# EAGLE board Iluminação e tomadas (EAGLE 7.6.0)

Size 73.58 x 63.39 mm. Coordinates in mm from the lower left corner, seen from the top.
Outline: 0,0 56.82,0 56.82,53.33 0,53.33 0,0
Copper layers (1*16): Top 0.035mm / dielectric 1.5mm / Bottom 0.035mm
Design rules "default": minimum track width 10mil, minimum drill 24mil, track to track 8mil, track to pad 8mil, pad to pad 8mil, via to via 8mil, smd to smd 8mil, copper to edge 40mil, drill to drill 8mil, minimum pad ring 10mil, minimum via ring 8mil, stop-mask expansion 4mil, vias tented up to drill 0mil, thermal gap 10mil

## Footprints (pad centres in the part's own frame; a part is rotated, then mirrored left to right if it is on the bottom)
LED5MM = drill 0.813 octagon: A -1.27,0; K 1.27,0
1X3P-2.54-2.54-11.6-3.0-BLACK-MALE = drill 0.889 pad 1.651 square: 1 0,2.54 | drill 0.889 pad 1.651: 2 0,0; 3 0,-2.54
PHOTORESISTOR-2.54 = drill 1 pad 1.5: P$1 -1.27,0; P$2 1.27,0
0207/10 = drill 0.813 octagon: 1 -5.08,0; 2 5.08,0
TL1105 = drill 1 pad 1.676: 1 -2.25,3.25; 2 2.25,3.25; 3 -2.25,-3.25; 4 2.25,-3.25
ARDUINO_UNO = drill 1.016 pad 1.88: 0 63.5,50.8; 1 60.96,50.8; 2 58.42,50.8; 3 55.88,50.8; 3.3V 35.56,2.54; 4 53.34,50.8; 5 50.8,50.8; 5V 38.1,2.54; 6 48.26,50.8; 7 45.72,50.8; 8 41.656,50.8; 9 39.116,50.8; 10 36.576,50.8; 11 34.036,50.8; 12 31.496,50.8; 13 28.956,50.8; A0 50.8,2.54; A1 53.34,2.54; A2 55.88,2.54; A3 58.42,2.54; A4 60.96,2.54; A5 63.5,2.54; AREF 23.876,50.8; GND 26.416,50.8; GND. 43.18,2.54; GND.. 40.64,2.54; I/OREF 30.48,2.54; N/C 27.94,2.54; RESET 33.02,2.54; SCL 18.796,50.8; SDA 21.336,50.8; VIN 45.72,2.54 | hole 3.2: 66.04,7.62; 66.04,35.56; 15.24,50.8; 13.97,2.54

## Placement (x,y rotation side)
D1  [LED5MM]  5,60.88 0 top
D2  [LED5MM]  5,276.78 0 top  (outside the outline)
D3  [LED5MM]  5,302.18 0 top  (outside the outline)
D4  [LED5MM]  5,314.88 0 top  (outside the outline)
D5  [LED5MM]  5,327.58 0 top  (outside the outline)
D6  [LED5MM]  5,340.28 0 top  (outside the outline)
PIRSensor LED 1  [1X3P-2.54-2.54-11.6-3.0-BLACK-MALE]  5,22.78 0 top
PIRSensor LED 2  [1X3P-2.54-2.54-11.6-3.0-BLACK-MALE]  5,73.58 0 top  (outside the outline)
R1  [PHOTORESISTOR-2.54]  5,35.48 0 top
R2  220‎Ω  [0207/10]  5,48.18 0 top
R3  1k‎Ω  [0207/10]  5,391.08 0 top  (outside the outline)
R4  [PHOTORESISTOR-2.54]  5,162.48 0 top  (outside the outline)
R5  10k‎Ω  [0207/10]  5,175.18 0 top  (outside the outline)
R6  10k‎Ω  [0207/10]  5,187.88 0 top  (outside the outline)
R7  10k‎Ω  [0207/10]  5,200.58 0 top  (outside the outline)
R8  10k‎Ω  [0207/10]  5,213.28 0 top  (outside the outline)
R9  10k‎Ω  [0207/10]  5,225.98 0 top  (outside the outline)
R10  10k‎Ω  [0207/10]  5,238.68 0 top  (outside the outline)
R12  1k‎Ω  [0207/10]  5,251.38 0 top  (outside the outline)
R13  220‎Ω  [0207/10]  5,264.08 0 top  (outside the outline)
R14  220‎Ω  [0207/10]  5,289.48 0 top  (outside the outline)
R15  220‎Ω  [0207/10]  5,352.98 0 top  (outside the outline)
R16  220‎Ω  [0207/10]  5,365.68 0 top  (outside the outline)
R19  220‎Ω  [0207/10]  5,378.38 0 top  (outside the outline)
S1  [TL1105]  5,137.08 0 top  (outside the outline)
S2  [TL1105]  5,86.28 0 top  (outside the outline)
S3  [TL1105]  5,98.98 0 top  (outside the outline)
S4  [TL1105]  5,111.68 0 top  (outside the outline)
S5  [TL1105]  5,149.78 0 top  (outside the outline)
SModos Auto/Manual  [TL1105]  5,124.38 0 top  (outside the outline)
U1  [ARDUINO_UNO]  5,10.08 0 top

## Library data of the parts
D1-D6 PIRSensor LED 1 PIRSensor LED 2 R1-R10 R12-R16 R19 S1-S5 SModos Auto/Manual U1 = AUTODESK_CIRCUITS_BREADBOARD

## Nets
N$1: R5.2 SModos Auto/Manual.4 U1.4
N$2: SModos Auto/Manual.3
N$3: PIRSensor LED 1.3 U1.8
N$4: PIRSensor LED 2.3 U1.9
N$5: SModos Auto/Manual.2
N$6: R6.2 S2.4 U1.A4
N$7: S2.2
N$8: S2.3
N$9: S3.2
N$10: S3.3
N$11: R8.2 S4.4 U1.11
N$12: S4.2
N$13: S4.3
N$14: R9.2 S1.4 U1.12
N$15: S1.2
N$16: S1.3
N$17: R10.1 S5.4 U1.13
N$18: S5.2
N$19: S5.3
N$20: R4.P$2 R12.1 U1.A1
N$21: R14.2 U1.6
N$22: R2.2 U1.10
N$23: R13.2 U1.5
N$24: R19.2 U1.7
N$25: D1.A R2.1
N$26: D2.A R13.1
N$27: D3.A R14.1
N$28: D6.A R19.1
N$29: D4.A R15.1
N$30: D5.A R16.1
N$31: R16.2 U1.2
N$32: R15.2 U1.3
N$33: D1.K D2.K D3.K D4.K D5.K D6.K PIRSensor LED 1.1 PIRSensor LED 2.1 R3.2 R5.1 R6.1 R7.1 R8.1 R9.1 R10.2 R12.2 U1.GND..
N$34: R1.P$2 R3.1 U1.A0
N$35: PIRSensor LED 1.2 PIRSensor LED 2.2 R1.P$1 R4.P$1 S1.1 S2.1 S3.1 S4.1 S5.1 SModos Auto/Manual.1 U1.5V
N$36: R7.2 S3.4 U1.A3

## Tracks (layer width: path | path; a pad name or v marks a point on that pad's centre or on a via)
N$1  (2 unrouted)
N$3  (1 unrouted)
N$4  (1 unrouted)
N$6  (2 unrouted)
N$11  (2 unrouted)
N$14  (2 unrouted)
N$17  (2 unrouted)
N$20  (2 unrouted)
N$21  (1 unrouted)
N$22  (1 unrouted)
N$23  (1 unrouted)
N$24  (1 unrouted)
N$25  (1 unrouted)
N$26  (1 unrouted)
N$27  (1 unrouted)
N$28  (1 unrouted)
N$29  (1 unrouted)
N$30  (1 unrouted)
N$31  (1 unrouted)
N$32  (1 unrouted)
N$33  (16 unrouted)
N$34  (2 unrouted)
N$35  (10 unrouted)
N$36  (2 unrouted)